# Altium PCB PCB_STM.PcbDoc (part 1 of 2)
Units mm, origin at the board's own origin, x right, y up, seen from the top; angles counter-clockwise.
Board outline 70.6 x 41.2 mm, 2 copper layers (Top Layer, Bottom Layer), stack 1.569 mm thick; 46 components, 35 nets, 243 pads, 370 vias.
Unrouted connection lines stored in the file: 46.
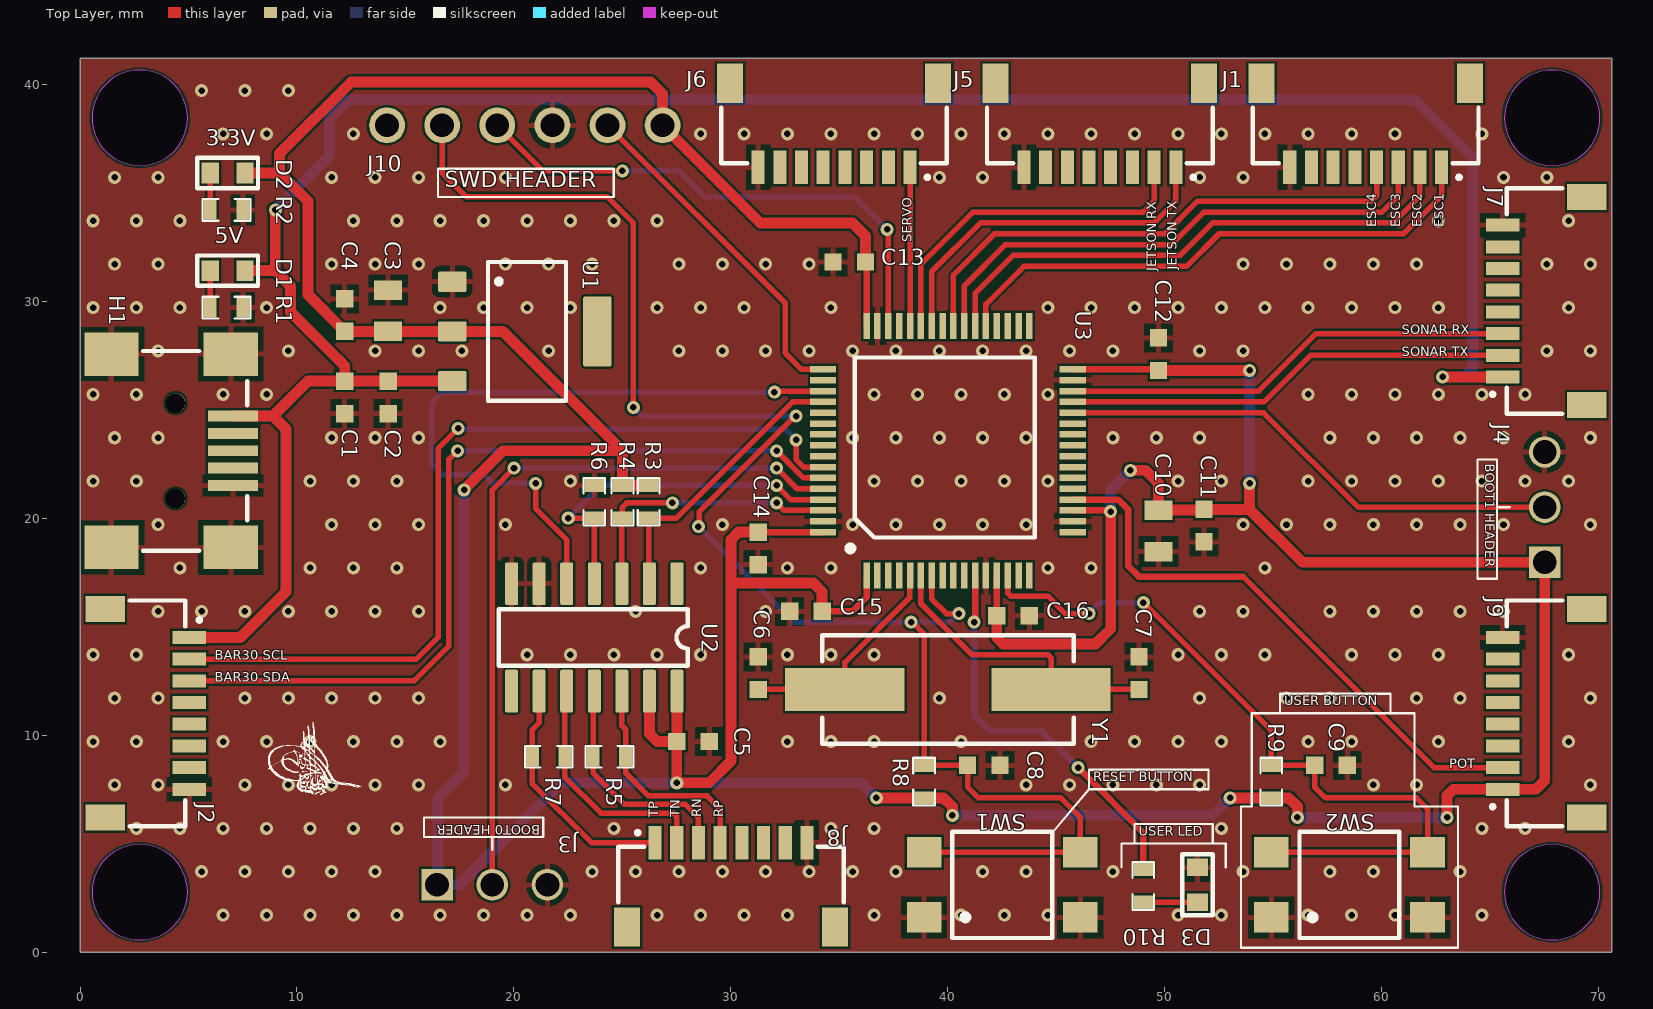
[diagram p0: Top Layer view]
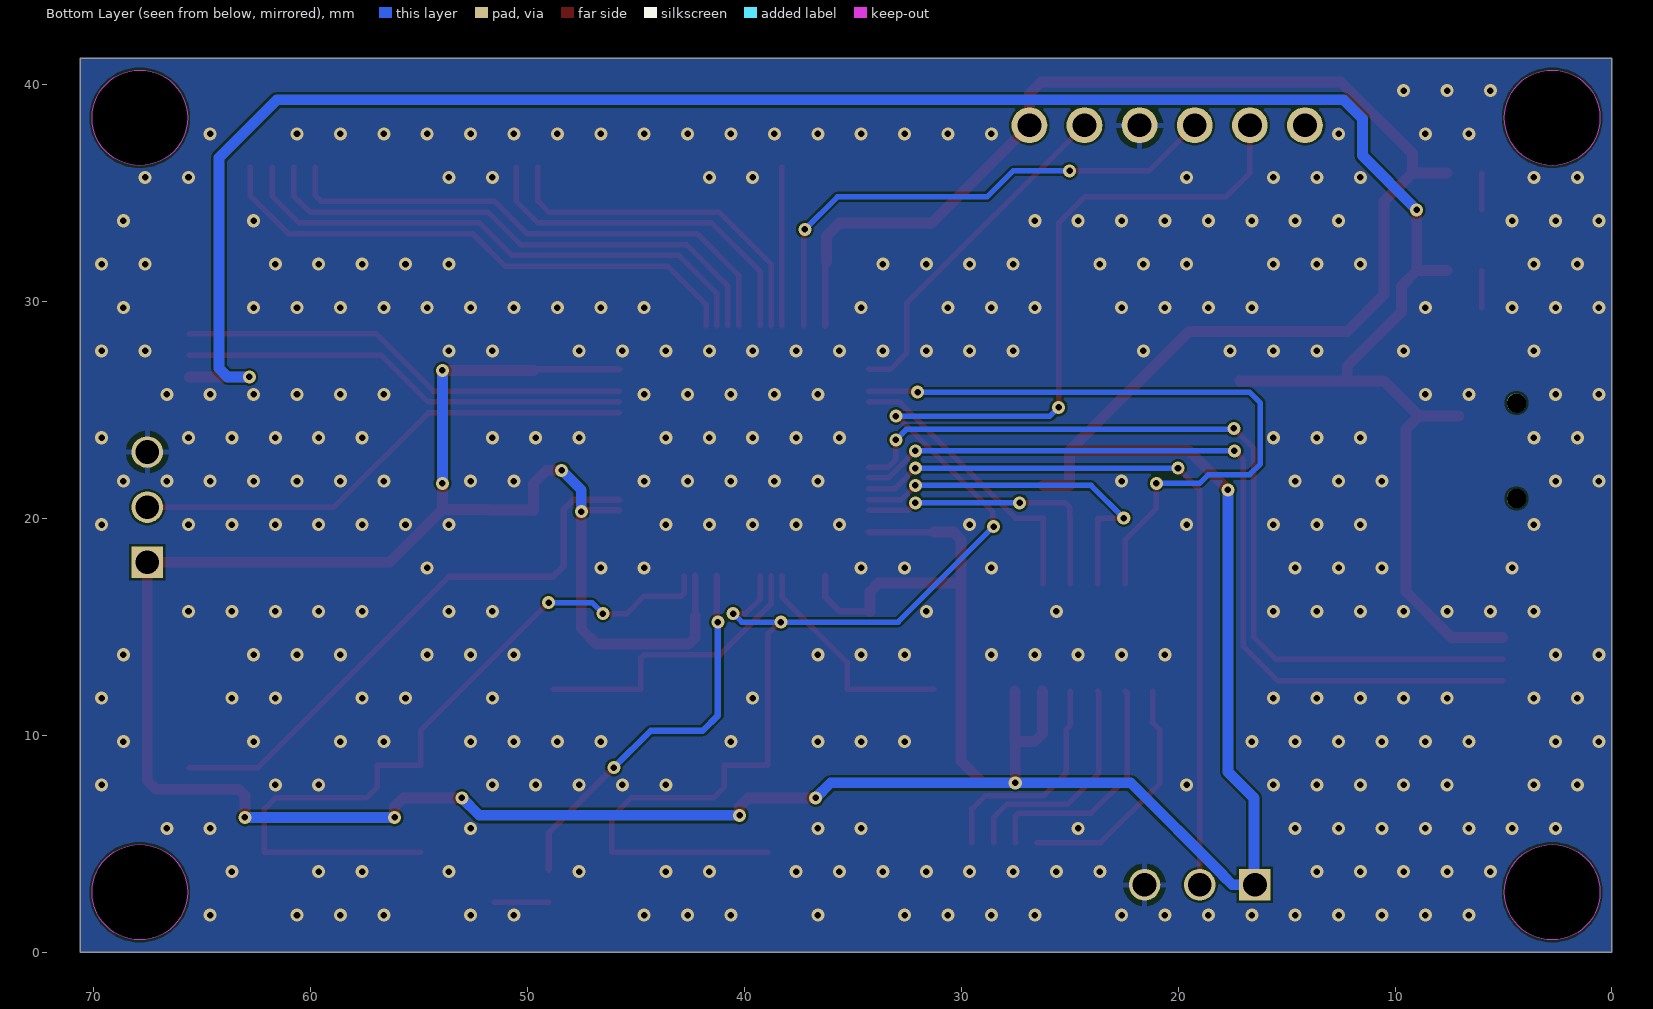
[diagram p1: Bottom Layer view, seen from below]
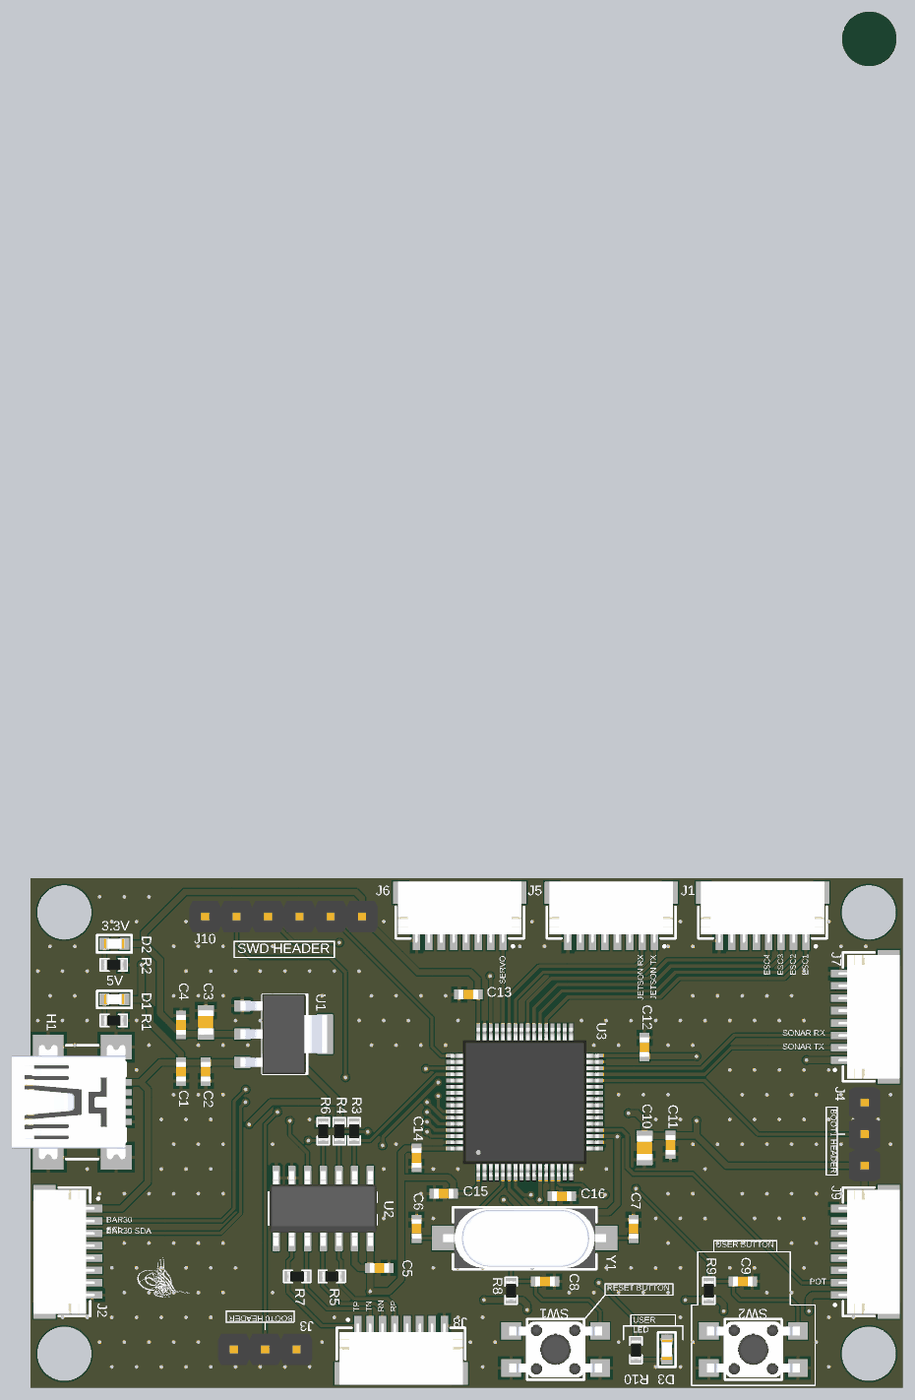
[diagram p2: 3D render of the assembled board from above, using the file's embedded part models]

## Layer stack, top to bottom
Top Solder: solder mask 0.0254, SM-001, Dk 4
Top Layer: signal copper 0.035
Dielectric 1: core 1.4986, Core-043, Dk 4.3
Bottom Layer: signal copper 0.035
Bottom Solder: solder mask 0.0254, SM-001, Dk 4

## Board outline
0,0 0,41.2 70.6,41.2 70.6,0
cut-out: 0.556,38.444 ccw(c2.756,38.444) 2.756,36.244 ccw(c2.756,38.444) 4.956,38.444 ccw(c2.756,38.444) 2.756,40.644 ccw(c2.756,38.444) 0.556,38.444
cut-out: 67.844,40.644 ccw(c67.844,38.444) 65.644,38.444 ccw(c67.844,38.444) 67.844,36.244 ccw(c67.844,38.444) 70.044,38.444 ccw(c67.844,38.444) 67.844,40.644
cut-out: 70.044,2.756 ccw(c67.844,2.756) 67.844,4.956 ccw(c67.844,2.756) 65.644,2.756 ccw(c67.844,2.756) 67.844,0.556 ccw(c67.844,2.756) 70.044,2.756
cut-out: 2.756,0.556 ccw(c2.756,2.756) 4.956,2.756 ccw(c2.756,2.756) 2.756,4.956 ccw(c2.756,2.756) 0.556,2.756 ccw(c2.756,2.756) 2.756,0.556
cut-out: 67.878,111.271 ccw(c67.878,109.071) 65.678,109.071 ccw(c67.878,109.071) 67.878,106.871 ccw(c67.878,109.071) 70.078,109.071 ccw(c67.878,109.071) 67.878,111.271

## Design rules (kind name [scope] priority, off if disabled: settings)
Clearance [All] p1: gap=0.153 ignorepadtopadclearanceinfootprint=TRUE
HoleToHoleClearance [All] p1: gap=0.1 allowstackedmicrovias=TRUE
MinimumSolderMaskSliver [All] p1: minsoldermaskwidth=0
PlaneClearance [All] p1: clearance=0.1
PolygonConnect [All] p1: connectstyle=Relief reliefconductorwidth=0.254 reliefentries=4 polygonreliefangle="90 Angle" airgapwidth=0.254
RoutingCorners [All] p1: cornerstyle=45-Degree minsetback=0.1 maxsetback=0.1
RoutingVias [All] p1: holewidth=0.2 width=0.4 viastyle="Through Hole" minholewidth=0.1 minwidth=0.3 maxholewidth=0.3 maxwidth=0.6
SilkToSilkClearance [All] p1: silktosilkclearance=0
SilkToSolderMaskClearance [IsPad] p1: minsilkscreentomaskgap=0 clearancetoexposedcopper=TRUE
SolderMaskExpansion [All] p1: expansion=0.01 istentingtop=FALSE
Width [All] p1: maxlimit=0.5 minlimit=0.254 preferedwidth=0.254 minimp=50.000000 maximp=50.000000 favimp=50.000000
24 further rules are at their usual default settings.

## Classes and differential pairs
component class PowerManagement: C1 C2 C3 C4 C5 D1 D2 H1 R1 R2 R3 R4 R5 R6 R7 U1 U2
component class Microcontroller: C6 C7 C8 C9 C10 C11 C12 C13 C14 C15 C16 D3 R8 R9 R10 SW1 SW2 U3 Y1
component class Connectors: J1 J2 J3 J4 J5 J6 J7 J8 J9 J10

## Components (designator, comment, footprint, x,y, rotation, side; value= is the part's Value field where it differs from the comment)
C1 "1uF" WCAP-CSGP_0603_L1.6W0.8H0.8_Reflow 12.2,25.56 r90 top
C2 "10uF" WCAP-CSGP_0603_L1.6W0.8H0.8_Reflow 14.2,25.56 r90 top
C3 "22uF" WCAP-CSGP_0805_L2W1.25H1.25 14.2,29.55 r270 top
C4 "1uF" WCAP-CSGP_0603_L1.6W0.8H0.8_Reflow 12.2,29.35 r270 top
C5 "100nF" WCAP-CSGP_0603_L1.6W0.8H0.8_Reflow 28.25,9.7 r180 top
C6 "15pF" WCAP-CSGP_0603_L1.6W0.8H0.8_Reflow 31.25,12.85 r270 top
C7 "15pF" WCAP-CSGP_0603_L1.6W0.8H0.8_Reflow 48.8,12.85 r270 top
C8 "100nF" WCAP-CSGP_0603_L1.6W0.8H0.8_Reflow 41.65,8.6 r0 top
C9 "100nF" WCAP-CSGP_0603_L1.6W0.8H0.8_Reflow 57.65,8.6 r0 top
C10 "4.7uF" WCAP-CSGP_0805_L2W1.25H1.25 49.7,19.4 r90 top
C11 "100nF" WCAP-CSGP_0603_L1.6W0.8H0.8_Reflow 51.8,19.65 r90 top
C12 "100nF" WCAP-CSGP_0603_L1.6W0.8H0.8_Reflow 49.7,27.55 r270 top
C13 "100nF" WCAP-CSGP_0603_L1.6W0.8H0.8_Reflow 35.45,31.8 r0 top
C14 "100nF" WCAP-CSGP_0603_L1.6W0.8H0.8_Reflow 31.25,18.6 r90 top
C15 "100nF" WCAP-CSGP_0603_L1.6W0.8H0.8_Reflow 33.45,15.7 r0 top
C16 "100nF" WCAP-CSGP_0603_L1.6W0.8H0.8_Reflow 43,15.5 r180 top
D1 "APT1608SGC" "LED GREEN" 6.802,31.4 r0 top
D2 "APT1608SGC" "LED GREEN" 6.802,35.9 r0 top
D3 "APT1608SGC" "LED GREEN" 51.5,3.1 r270 top
H1 "690-005-299-043" USB 4.25,23.1 r270 top
J1 "SM08B-SRSS-TB(LF)(SN)" "8 PIN HEADER" 59.25,38.1 r180 top
J2 "SM08B-SRSS-TB(LF)(SN)" "8 PIN HEADER" 3.1,11 r270 top
J3 "61300311121" "BOOT HEADER" 19,3.1 r0 top
J4 "61300311121" "BOOT HEADER" 67.5,20.5 r90 top
J5 "SM08B-SRSS-TB(LF)(SN)" "8 PIN HEADER" 47,38.1 r180 top
J6 "SM08B-SRSS-TB(LF)(SN)" "8 PIN HEADER" 34.75,38.1 r180 top
J7 "SM08B-SRSS-TB(LF)(SN)" "8 PIN HEADER" 67.5,30 r90 top
J8 "SM08B-SRSS-TB(LF)(SN)" "8 PIN HEADER" 30,3.1 r0 top
J9 "SM08B-SRSS-TB(LF)(SN)" "8 PIN HEADER" 67.5,11 r90 top
J10 "61300611121" "SWD HEADER" 20.5,38.1 r180 top
R1 "RC0603FR-07150RL" "RES 0603" 6.752,29.7 r180 top
R2 "RC0603FR-13100RL" "RES 0603" 6.752,34.2 r180 top
R3 "RC0603FR-0710KP" "RES 0603" 26.2,20.75 r90 top
R4 "RC0603FR-0710KP" "RES 0603" 25,20.75 r90 top
R5 "RC0603FR-07120RL" "RES 0603" 24.4,9 r180 top
R6 "RC0603FR-0710KP" "RES 0603" 23.7,20.75 r90 top
R7 "RC0603FR-07120RL" "RES 0603" 21.6,9 r0 top
R8 "RC0603FR-0710KP" "RES 0603" 38.9,7.85 r90 top
R9 "RC0603FR-0710KP" "RES 0603" 54.9,7.85 r90 top
R10 "RC0603FR-07330RL" "RES 0603" 49,3.05 r90 top
SW1 "TL3305AF260QG" "RESET BUTTON" 42.5,3.1 r90 top
SW2 "TL3305AF260QG" "RESET BUTTON" 58.5,3.1 r90 top
U1 "AMS1117-3.3" SOT-223 20.5,28.6 r0 top
U2 "SN65HVD1473DR" 14-SOIC 23.7,14.5 r270 top
U3 "STM32F107RCT6" STM32F107RCT6 40,23.1 r90 top
Y1 "ECS-80-20-5PXDU-TR" OSC 40,12.1 r0 top

## Footprints (in the part's own frame and the unit in brackets; to place one, negate y for a bottom-side part, rotate by r counter-clockwise, add the part's x,y. Pads: shape width x height; smd on the part's side, far side on the other; paste and mask are expansions set on the pad)
"8 PIN HEADER" [mm]
  rect 0.6x1.55 smd: 1(-3.5,1.938) 2(-2.5,1.938) 3(-1.5,1.938) 4(-0.5,1.938) 5(0.5,1.938) 6(1.5,1.938) 7(2.5,1.938) 8(3.5,1.938)
  rect 1.2x1.8 smd: P1(-4.8,-1.937) P2(4.8,-1.937)
  silkscreen extent -5.2,-0.8 5.2,2.47, body extent -5,-2.84 5,2.11, height 2.95
14-SOIC [mm]
  rrect25% 1.97x0.6 smd: 1(-2.475,3.81) 2(-2.475,2.54) 3(-2.475,1.27) 4(-2.475,0) 5(-2.475,-1.27) 6(-2.475,-2.54) 7(-2.475,-3.81) 8(2.475,-3.81) 9(2.475,-2.54) 10(2.475,-1.27) 11(2.475,0) 12(2.475,1.27) 13(2.475,2.54) 14(2.475,3.81)
  silkscreen extent -1.3,-4.4 1.3,4.3, body extent -3.01,-4.33 3.01,4.33, height 1.75
"BOOT HEADER" [mm]
  rect 1.45x1.45 / inner round 1.45 / far side rect 1.45x1.45 hole 1.1: 1(-2.54,0)
  round 1.45 hole 1.1: 2(0,0) 3(2.54,0)
  body extent -3.81,-1.27 3.81,1.27, height 8.77
"LED GREEN" [mm]
  rect 0.8x0.95 smd: 1(-0.8,0) 2(0.8,0)
  silkscreen extent -1.4,-0.7 1.4,0.7, body extent -0.81,-0.4 0.8,0.4, height 0.72
OSC [mm]
  rect 5.5x2 smd: 1(-4.75,0) 2(4.75,0)
  silkscreen extent -5.8,-2.5 5.8,2.5, body extent -6.6,-2.41 6.6,2.39, height 4.3
"RES 0603" [mm]
  rect 0.6x0.9 smd mask+0.05: 1(-0.75,0) 2(0.75,0)
  silkscreen extent -1.1,-0.5 1.1,0.5, body extent -0.8,-0.4 0.8,0.4, height 0.45
"RESET BUTTON" [mm]
  rect 1.4x1.6 smd: 1(-1.5,3.6) 2(-1.5,-3.6) 3(1.5,3.6) 4(1.5,-3.6)
  silkscreen extent -2.45,-2.3 2.45,2.3, body extent -2.25,-3.75 2.25,3.75, height 3.8
SOT-223 [mm]
  rrect15% 1.31x0.93 smd: 1(-3.345,2.29) 2(-3.345,0) 3(-3.345,-2.29)
  rrect15% 1.31x3.24 smd: 4(3.345,0)
  silkscreen extent -1.7,-3.2 1.9,3.2, body extent -3.5,-3.25 3.5,3.25, height 1.8
STM32F107RCT6 [mm]
  rect 1.2x0.3 smd mask+0.05: 1(-5.75,3.75) 2(-5.75,3.25) 3(-5.75,2.75) 4(-5.75,2.25) 5(-5.75,1.75) 6(-5.75,1.25) 7(-5.75,0.75) 8(-5.75,0.25) 9(-5.75,-0.25) 10(-5.75,-0.75) 11(-5.75,-1.25) 12(-5.75,-1.75) 13(-5.75,-2.25) 14(-5.75,-2.75) 15(-5.75,-3.25) 16(-5.75,-3.75) 33(5.75,-3.75) 34(5.75,-3.25) 35(5.75,-2.75) 36(5.75,-2.25) 37(5.75,-1.75) 38(5.75,-1.25) 39(5.75,-0.75) 40(5.75,-0.25) 41(5.75,0.25) 42(5.75,0.75) 43(5.75,1.25) 44(5.75,1.75) 45(5.75,2.25) 46(5.75,2.75) 47(5.75,3.25) 48(5.75,3.75)
  rect 0.3x1.2 smd mask+0.05: 17(-3.75,-5.75) 18(-3.25,-5.75) 19(-2.75,-5.75) 20(-2.25,-5.75) 21(-1.75,-5.75) 22(-1.25,-5.75) 23(-0.75,-5.75) 24(-0.25,-5.75) 25(0.25,-5.75) 26(0.75,-5.75) 27(1.25,-5.75) 28(1.75,-5.75) 29(2.25,-5.75) 30(2.75,-5.75) 31(3.25,-5.75) 32(3.75,-5.75) 49(3.75,5.75) 50(3.25,5.75) 51(2.75,5.75) 52(2.25,5.75) 53(1.75,5.75) 54(1.25,5.75) 55(0.75,5.75) 56(0.25,5.75) 57(-0.25,5.75) 58(-0.75,5.75) 59(-1.25,5.75) 60(-1.75,5.75) 61(-2.25,5.75) 62(-2.75,5.75) 63(-3.25,5.75) 64(-3.75,5.75)
  silkscreen extent -4.62,-4 4.3,4.62, body extent -6,-6 6,6, height 1.6
"SWD HEADER" [mm]
  round 1.65 hole 1.1: 1(-6.35,0) 2(-3.81,0) 3(-1.27,0) 4(1.27,0) 5(3.81,0) 6(6.35,0)
  body extent -7.62,-1.27 7.62,1.27, height 8.77
USB [mm]
  rect 0.5x2.3 smd: 1(-1.6,2.8) 2(-0.8,2.8) 3(0,2.8) 4(0.8,2.8) 5(1.6,2.8)
  rect 2x2.5 smd: S1(-4.45,2.7) S2(4.45,2.7) S3(4.45,-2.8) S4(-4.45,-2.8)
  round 0.9 hole 0.9 unplated: ""(-2.2,0.15) ""(2.2,0.15)
  silkscreen extent -4.6,-1.35 4.6,3.45, body extent -4.62,-5.75 4.62,3.45, height 3.98
WCAP-CSGP_0603_L1.6W0.8H0.8_Reflow [mm] "Ceramic Capacitors, body 1.6x0.8mm"
  rect 0.8x0.8 smd: 1(-0.75,0) 2(0.75,0)
  body extent -0.8,-0.4 0.8,0.4, height 0.8
WCAP-CSGP_0805_L2W1.25H1.25 [mm] "Ceramic Capacitors, body 2x1.25mm"
  rect 0.9x1.3 smd: 1(-0.95,0) 2(0.95,0)
  body extent -1,-0.63 1,0.63, height 1.25

## Part data
C1 C4: library part 885012106010, "WCAP-CSGP Multilayer Ceramic Chip Capacitor, General Purpose, size 0603, X5R, 1µF, 10VDC", Capacitance Tolerance=+/-20%, Case/Size Code=0603, Manufacturer="Wurth Elektronik", Operating Temperature Max=85°C, Operating Temperature Min=-55°C, Rated Voltage (DC)=10V, Insulation Resistance=0.1GOhm, Capacitance=1uF, Category="Multilayer Ceramic Chip Capacitors", Ceramic Type=X5R, ComponentLink1Description="Website Link", ComponentLink1URL=https://www.we-online.com/redexpert/article/885012106010?ad, ComponentLink2Description="Datasheet Link", ComponentLink2URL=https://www.we-online.com/redexpert/spec/885012106010?ad, Dissipation Factor=10%, Height=0.8mm, Length=1.6mm, Manufacturer Part Number=885012106010, Match Code=WCAP-CSGP, Mount="Surface Mount", Packaging="Tape and Reel", Technical Reference=X5R0603105M010DFCT10000, Width=0.8mm
C2: library part 885012106031, "WCAP-CSGP Multilayer Ceramic Chip Capacitor, General Purpose, size 0603, X5R, 10µF, 25VDC", Capacitance Tolerance=+/20%, Case/Size Code=0603, Manufacturer="Wurth Elektronik", Operating Temperature Max=85°C, Operating Temperature Min=-55°C, Rated Voltage (DC)=25V, Insulation Resistance=0.01GOhm, Capacitance=10uF, Category="Multilayer Ceramic Chip Capacitors", Ceramic Type=X5R, ComponentLink1Description="Website Link", ComponentLink1URL=https://www.we-online.com/redexpert/article/885012106031?ad, ComponentLink2Description="Datasheet Link", ComponentLink2URL=https://www.we-online.com/redexpert/spec/885012106031?ad, Dissipation Factor=20%, Height=0.8mm, Length=1.6mm, Manufacturer Part Number=885012106031, Match Code=WCAP-CSGP, Mount="Surface Mount", Packaging="Tape and Reel", Technical Reference=X5R0603106M025DFCT10000, Width=0.8mm
C3: library part 885012107011, "WCAP-CSGP Multilayer Ceramic Chip Capacitor, General Purpose, size 0805, X5R, 22µF, 10VDC", Capacitance Tolerance=+/-20%, Case/Size Code=0805, Manufacturer="Wurth Elektronik", Operating Temperature Max=85°C, Operating Temperature Min=-55°C, Rated Voltage (DC)=10V, Insulation Resistance=0.005GOhm, Capacitance=22uF, Category="Multilayer Ceramic Chip Capacitors", Ceramic Type=X5R, ComponentLink1Description="Website Link", ComponentLink1URL=https://www.we-online.com/redexpert/article/885012107011?ad, ComponentLink2Description="Datasheet Link", ComponentLink2URL=https://www.we-online.com/redexpert/spec/885012107011?ad, Dissipation Factor=10%, Height=1.25mm, Length=2mm, Manufacturer Part Number=885012107011, Match Code=WCAP-CSGP, Mount="Surface Mount", Packaging="Tape and Reel", Technical Reference=X5R0805226M010DFCT10000, Width=1.25mm
C5 C11 C12 C13 C14 C15 C16: library part 885012206046, "WCAP-CSGP Multilayer Ceramic Chip Capacitor, General Purpose, size 0603, X7R, 100nF, 16VDC", Capacitance Tolerance=+/-10%, Case/Size Code=0603, Manufacturer="Wurth Elektronik", Operating Temperature Max=125°C, Operating Temperature Min=-55°C, Rated Voltage (DC)=16V, Insulation Resistance=5GOhm, Capacitance=100nF, Category="Multilayer Ceramic Chip Capacitors", Ceramic Type=X7R, ComponentLink1Description="Website Link", ComponentLink1URL=https://www.we-online.com/redexpert/article/885012206046?ad, ComponentLink2Description="Datasheet Link", ComponentLink2URL=https://www.we-online.com/redexpert/spec/885012206046?ad, Dissipation Factor=3.5%, Height=0.8mm, Length=1.6mm, Manufacturer Part Number=885012206046, Match Code=WCAP-CSGP, Mount="Surface Mount", Packaging="Tape and Reel", Technical Reference=X7R0603104K016DFCT10000, Width=0.8mm
C6 C7: library part 885012006018, "WCAP-CSGP Multilayer Ceramic Chip Capacitor, General Purpose, size 0603, NP0, 15pF, 16VDC", Capacitance Tolerance=+/-5%, Case/Size Code=0603, Manufacturer="Wurth Elektronik", Operating Temperature Max=125°C, Operating Temperature Min=-55°C, Rated Voltage (DC)=16V, Insulation Resistance=10GOhm, Capacitance=15pF, Category="Multilayer Ceramic Chip Capacitors", Ceramic Type=NP0, ComponentLink1Description="Website Link", ComponentLink1URL=https://www.we-online.com/redexpert/article/885012006018?ad, ComponentLink2Description="Datasheet Link", ComponentLink2URL=https://www.we-online.com/redexpert/spec/885012006018?ad, Height=0.8mm, Length=1.6mm, Manufacturer Part Number=885012006018, Match Code=WCAP-CSGP, Mount="Surface Mount", Packaging="Tape and Reel", Q Factor=700, Technical Reference=NP00603150J016DFCT10000, Width=0.8mm
C8 C9: library part 885012206020, "WCAP-CSGP Multilayer Ceramic Chip Capacitor, General Purpose, size 0603, X7R, 100nF, 10VDC", Capacitance Tolerance=+/-10%, Case/Size Code=0603, Manufacturer="Wurth Elektronik", Operating Temperature Max=125°C, Operating Temperature Min=-55°C, Rated Voltage (DC)=10V, Insulation Resistance=5GOhm, Capacitance=100nF, Category="Multilayer Ceramic Chip Capacitors", Ceramic Type=X7R, ComponentLink1Description="Website Link", ComponentLink1URL=https://www.we-online.com/redexpert/article/885012206020?ad, ComponentLink2Description="Datasheet Link", ComponentLink2URL=https://www.we-online.com/redexpert/spec/885012206020?ad, Dissipation Factor=5%, Height=0.8mm, Length=1.6mm, Manufacturer Part Number=885012206020, Match Code=WCAP-CSGP, Mount="Surface Mount", Packaging="Tape and Reel", Technical Reference=X7R0603104K010DFCT10000, Width=0.8mm
C10: library part 885012207053, "WCAP-CSGP Multilayer Ceramic Chip Capacitor, General Purpose, size 0805, X7R, 4.7µF, 16VDC", Capacitance Tolerance=+/-10%, Case/Size Code=0805, Manufacturer="Wurth Elektronik", Operating Temperature Max=125°C, Operating Temperature Min=-55°C, Rated Voltage (DC)=16V, Insulation Resistance=0.02GOhm, Capacitance=4.7uF, Category="Multilayer Ceramic Chip Capacitors", Ceramic Type=X7R, ComponentLink1Description="Website Link", ComponentLink1URL=https://www.we-online.com/redexpert/article/885012207053?ad, ComponentLink2Description="Datasheet Link", ComponentLink2URL=https://www.we-online.com/redexpert/spec/885012207053?ad, Dissipation Factor=10%, Height=1.25mm, Length=2mm, Manufacturer Part Number=885012207053, Match Code=WCAP-CSGP, Mount="Surface Mount", Packaging="Tape and Reel", Technical Reference=X7R0805475K016DFCT10000, Width=1.25mm
D1 D2 D3: "LED GREEN CLEAR 0603 SMD", Case Code (Metric)=1608, Case Code (Imperial)=0603, Color=Green, Forward Current=20mA, Forward Voltage=2.2V, Lens Color=Clear, Manufacturer=Kingbright, Max Operating Temperature=85°C, Min Operating Temperature=-40°C, Package Quantity=2000, Supplier Part Number 1=754-1121-1-ND, Case/Package=0603, Category=LEDs, ComponentLink1Description=https://datasheet.ciiva.com/12400/apt1608sgc-32861-12400932.pdf?src-supplier=Mouser, ComponentLink1URL=https://datasheet.ciiva.com/12400/apt1608sgc-32861-12400932.pdf?src-supplier=Mouser, ComponentLink2Description=https://datasheet.ciiva.com/2113/apt1608sgc-2113808.pdf?src-supplier=Digi-Key, ComponentLink2URL=https://datasheet.ciiva.com/2113/apt1608sgc-2113808.pdf?src-supplier=Digi-Key, ComponentLink3Description=https://datasheet.ciiva.com/14603/70062839-14603927.pdf?src-supplier=Allied+Electronics, ComponentLink3URL=https://datasheet.ciiva.com/14603/70062839-14603927.pdf?src-supplier=Allied+Electronics, Designed by=ADAK, Dominant Wavelength=568nm, Height=0.75mm, Lead Free="Lead Free", Length=1.6mm, Lens Style=Clear,Flat, Luminous Intensity=15mcd, Manufacturer Part Number=APT1608SGC, Mount="Surface Mount", Number of LEDs=1, Number of Pins=2, Packaging="Tape and Reel", Pricing 1="1=0,3, 10=0,237, 100=0,1064, 500=0,0961, 1000=0,07894 (USD)", RoHS=Yes, RoHS Compliant=Yes, Series=APT, Stock 1=356278, Supplier 1=Digi-Key, Test Current=20mA, Viewing Angle=120°, Wavelength=568nm, Width=0.8mm, Illumination Color=Green
H1: library part "USB Mini B", "CONN RCPT USB2.0 MINI B SMD R/A", Color=Black, Flammability Rating="UL94 V-0", Manufacturer=EDAC, Max Operating Temperature=80°C, Min Operating Temperature=-30°C, Supplier Part Number 1=151-1206-1-ND, Category="USB Connectors", ComponentLink1Description=https://datasheet.ciiva.com/30246/690-005-299-043-30246515.pdf?src-supplier=Onlinecomponents.com, ComponentLink1URL=https://datasheet.ciiva.com/30246/690-005-299-043-30246515.pdf?src-supplier=Onlinecomponents.com, ComponentLink2Description=https://datasheet.ciiva.com/29660/690-005-299-043-29660027.pdf?src-supplier=Digi-Key, ComponentLink2URL=https://datasheet.ciiva.com/29660/690-005-299-043-29660027.pdf?src-supplier=Digi-Key, ComponentLink3Description=https://datasheet.ciiva.com/29660/690-005-299-043-29660028.pdf?src-supplier=Digi-Key, ComponentLink3URL=https://datasheet.ciiva.com/29660/690-005-299-043-29660028.pdf?src-supplier=Digi-Key, ComponentLink4Description=https://datasheet.ciiva.com/29660/690-005-299-043-29660029.pdf?src-supplier=Digi-Key, ComponentLink4URL=https://datasheet.ciiva.com/29660/690-005-299-043-29660029.pdf?src-supplier=Digi-Key, Connector Type=USB, Contact Material=Bronze, Contact Plating=Gold, Designed by=ADAK, Gender=Receptacle, Housing Material=Thermoplastic, Lead Free="Lead Free", Manufacturer Part Number=690-005-299-043, Mating Cycles=1500, Mount="Surface Mount,Horizontal", Number of Contacts=5, Number of Ports=1, Orientation="Right Angle", Packaging="Cut Tape", Pitch=0.8mm, Pricing 1="1=0,65, 10=0,564, 25=0,5152, 50=0,4848, 100=0,4646, 250=0,4242, 500=0,404 (USD)", RoHS=No, Series=690, Shielding=Unshielded, Stock 1=72958, Supplier 1=Digi-Key, Termination=Solder, Insulation Color=Black
J1 J2 J5 J6 J7 J8 J9: "Connector Header, Side Entry, SR Series, 8 Position, 1.00mm, 50V, Surface Mount, Tin, Natural", Manufacturer=JST, Supplier Part Number 1=1679124, Category=Connectors, ComponentLink1Description=https://datasheet.ciiva.com/11752/0900766b8082f54b-11752174.pdf?src-supplier=Rs, ComponentLink1URL=https://datasheet.ciiva.com/11752/0900766b8082f54b-11752174.pdf?src-supplier=Rs, ComponentLink2Description=https://datasheet.ciiva.com/8052/91630-8052285.pdf?src-supplier=Element14, ComponentLink2URL=https://datasheet.ciiva.com/8052/91630-8052285.pdf?src-supplier=Element14, ComponentLink3Description=https://datasheet.ciiva.com/729/esr-729838.pdf?src-supplier=Digi-Key, ComponentLink3URL=https://datasheet.ciiva.com/729/esr-729838.pdf?src-supplier=Digi-Key, ComponentLink4Description=https://datasheet.ciiva.com/712/esr-712599.pdf?src-supplier=Digi-Key, ComponentLink4URL=https://datasheet.ciiva.com/712/esr-712599.pdf?src-supplier=Digi-Key, ComponentLink5Description=https://datasheet.ciiva.com/712/esr-712600.pdf?src-supplier=Digi-Key, ComponentLink5URL=https://datasheet.ciiva.com/712/esr-712600.pdf?src-supplier=Digi-Key, ComponentLink6Description=https://datasheet.ciiva.com/16487/esr-16487087.pdf?src-supplier=Future+Electronics, ComponentLink6URL=https://datasheet.ciiva.com/16487/esr-16487087.pdf?src-supplier=Future+Electronics, Designed by=ADAK, Manufacturer Part Number=SM08B-SRSS-TB(LF)(SN), Pricing 1="10=0,776, 100=0,639, 500=0,522, 1000=0,464, 2500=0,443, 5000=0,421 (EUR)", RoHS=Yes, Stock 1=77890, Supplier 1=Farnell
J3 J4: "CONN HEADER VERT 3POS 2.54MM", Color=Black, Manufacturer="Wurth Electronics", Supplier Part Number 1=732-5316-ND, Category=Connectors, ComponentLink1Description=http://www.farnell.com/cad/1737268.pdf?src-supplier=Element14, ComponentLink1URL=http://www.farnell.com/cad/1737268.pdf?src-supplier=Element14, ComponentLink2Description=https://datasheet.octopart.com/61300311121-W%C3%BCrth-Elektronik-datasheet-21154836.pdf?src-supplier=Element14, ComponentLink2URL=https://datasheet.octopart.com/61300311121-W%C3%BCrth-Elektronik-datasheet-21154836.pdf?src-supplier=Element14, ComponentLink3Description=https://katalog.we-online.de/em/datasheet/6130xx11121.pdf?src-supplier=Digi-Key, ComponentLink3URL=https://katalog.we-online.de/em/datasheet/6130xx11121.pdf?src-supplier=Digi-Key, Contact Material=Copper, Contact Mating Length=0.236inch, Contact Plating=Gold, Contact Type="Male Pin", Designed by=ADAK, Gender=Male, Lead Free="Lead Free", Manufacturer Part Number=61300311121, Mount="Through Hole", Number of Contacts=3, Number of Positions=3, Number of Rows=1, Packaging=Bulk, Pitch=0.1inch, Pricing 1="1=0,13, 10=0,113, 25=0,094, 50=0,079, 100=0,071, 1000=0,066 (USD)", Reach SVHC Compliant=Unknown, RoHS=Yes, RoHS Compliant=Yes, Series=WR-PHD, Stock 1=116212, Supplier 1=Digi-Key, Termination=Solder
J10: "CONN HEADER VERT 6POS 2.54MM", Color=Black, Current Rating=3A, Manufacturer="Wurth Electronics", Max Operating Temperature=125°C, Min Operating Temperature=-40°C, Supplier Part Number 1=732-5319-ND, Voltage Rating=250V, Category="Headers and Wire Housings", ComponentLink1Description=http://www.mouser.com/ds/2/445/6130xx11121-538006.pdf?src-supplier=Mouser, ComponentLink1URL=http://www.mouser.com/ds/2/445/6130xx11121-538006.pdf?src-supplier=Mouser, ComponentLink2Description=http://www.farnell.com/cad/1737268.pdf?src-supplier=Element14, ComponentLink2URL=http://www.farnell.com/cad/1737268.pdf?src-supplier=Element14, ComponentLink3Description=https://datasheet.octopart.com/61300611121-W%C3%BCrth-Elektronik-datasheet-21154836.pdf?src-supplier=Element14, ComponentLink3URL=https://datasheet.octopart.com/61300611121-W%C3%BCrth-Elektronik-datasheet-21154836.pdf?src-supplier=Element14, ComponentLink4Description=https://katalog.we-online.de/em/datasheet/6130xx11121.pdf?src-supplier=Digi-Key, ComponentLink4URL=https://katalog.we-online.de/em/datasheet/6130xx11121.pdf?src-supplier=Digi-Key, Contact Gender=Male, Contact Material="Copper Alloy,Copper", Contact Mating Length=0.236inch, Contact Plating=Gold, Contact Type="Male Pin", Designed by=ADAK, Gender=Male, Housing Material=PBT, Lead Free="Lead Free", Manufacturer Part Number=61300611121, Mount="Through Hole", Number of Contacts=6, Number of Positions=6, Number of Rows=1, Packaging=Bulk, Pitch=0.1inch, Pricing 1="1=0,35, 10=0,298, 25=0,2472, 50=0,207, 100=0,187, 1000=0,171 (USD)", Reach SVHC Compliant=Unknown, RoHS=Yes, RoHS Compliant=Yes, Series=WR-PHD, Stock 1=10537, Supplier 1=Digi-Key, Termination="Through Hole"
R1: library part "RES 150 OHM 0603", "RES 150 OHM 1% 1/10W 0603 SMD", Case Code (Metric)=1608, Case Code (Imperial)=0603, Manufacturer=Yageo, Max Operating Temperature=155°C, Max Power Dissipation=100mW, Min Operating Temperature=-55°C, Package Quantity=5000, Resistance=150R, Resistance Tolerance=1%, Resistor Type="Thick Film", Supplier Part Number 1=311-150HRCT-ND, Temperature Coefficient=100ppm/°C, Voltage Rating=50V, Case/Package=0603, Category="Chip SMD Resistors", ComponentLink1Description=https://datasheet.ciiva.com/46412/443971-46412844.pdf?src-supplier=Element14, ComponentLink1URL=https://datasheet.ciiva.com/46412/443971-46412844.pdf?src-supplier=Element14, ComponentLink2Description=https://datasheet.ciiva.com/46440/1868787-46440893.pdf?src-supplier=Element14, ComponentLink2URL=https://datasheet.ciiva.com/46440/1868787-46440893.pdf?src-supplier=Element14, ComponentLink3Description=https://datasheet.ciiva.com/12555/rc0603-272842-12555301.pdf?src-supplier=Mouser, ComponentLink3URL=https://datasheet.ciiva.com/12555/rc0603-272842-12555301.pdf?src-supplier=Mouser, Designed by=ADAK, Features="Moisture Resistant", Height=0.45mm, Lead Free="Lead Free", Length=1.6mm, Manufacturer Part Number=RC0603FR-07150RL, Number of Pins=2, Number of Terminations=2, Packaging="Tape and Reel", Power Rating=100mW, Pricing 1="1=0,1, 10=0,018, 50=0,0106, 100=0,0088, 500=0,00592, 1000=0,00505 (USD)", Reach SVHC Compliant=No, RoHS=Yes, RoHS Compliant=Yes, Series=RC, Size Code=0603, Stock 1=1463209, Supplier 1=Digi-Key, Termination=SMD/SMT, Tolerance=1%, Voltage Rating (DC)=50V, Width=0.8mm
R2: library part "RES 100 OHM 0603", "RES 100 OHM 1% 1/10W 0603 SMD", Case Code (Metric)=1608, Case Code (Imperial)=0603, Manufacturer=Yageo, Max Operating Temperature=155°C, Min Operating Temperature=-55°C, Power Rating=100mW, Resistance=100R, Resistance Tolerance=1%, Resistor Type="Thick Film", Supplier Part Number 1=13-RC0603FR-13100RLCT-ND, Temperature Coefficient=100ppm/°C, Voltage Rating=50V, Case/Package=0603, Category="Chip SMD Resistors", ComponentLink1Description=https://datasheet.ciiva.com/7983/443971-7983671.pdf?src-supplier=Element14, ComponentLink1URL=https://datasheet.ciiva.com/7983/443971-7983671.pdf?src-supplier=Element14, ComponentLink2Description=https://datasheet.ciiva.com/12561/rc0603-272842-12561884.pdf?src-supplier=Mouser, ComponentLink2URL=https://datasheet.ciiva.com/12561/rc0603-272842-12561884.pdf?src-supplier=Mouser, Designed by=ADAK, Height=0.45mm, Lead Free="Lead Free", Length=1.6mm, Manufacturer Part Number=RC0603FR-13100RL, Number of Pins=2, Packaging="Tape and Reel", Pricing 1="1=0,1, 10=0,018, 50=0,0106, 100=0,0088, 500=0,00592, 1000=0,00505, 5000=0,00363, 10000=0,00318 (USD)", Reach SVHC Compliant=No, RoHS=Yes, RoHS Compliant=Yes, Series=RC, Size Code=0603, Stock 1=77195, Supplier 1=Digi-Key, Termination=SMD/SMT, Tolerance=1%, Voltage Rating (DC)=50V, Width=0.8mm
R3 R4 R6 R8 R9: library part "RES 10K OHM 0603", "RES 10K OHM 1% 1/10W 0603 SMD", Case Code (Metric)=1608, Case Code (Imperial)=0603, Manufacturer=Yageo, Max Operating Temperature=155°C, Max Power Dissipation=100mW, Min Operating Temperature=-55°C, Resistance=10kR, Supplier Part Number 1=YAG1290CT-ND, Temperature Coefficient=150ppm/°C, Tolerance=1%, Case/Package=0603, Category="Chip SMD Resistors", ComponentLink1Description=https://www.mouser.com/ds/2/447/yageodocoutput-1115409.pdf?src-supplier=Mouser, ComponentLink1URL=https://www.mouser.com/ds/2/447/yageodocoutput-1115409.pdf?src-supplier=Mouser, ComponentLink2Description=http://www.yageo.com/NewPortal/yageodocoutput?fileName=/pdf/R-Chip/PYu-RC_51_RoHS_P_0.pdf&src-supplier=Digi-Key, ComponentLink2URL=http://www.yageo.com/NewPortal/yageodocoutput?fileName=/pdf/R-Chip/PYu-RC_51_RoHS_P_0.pdf&src-supplier=Digi-Key, ComponentLink3Description=http://www.yageo.com.tw/exep/pages/download/literatures/PYu-R_INT-thick_7.pdf?src-supplier=Digi-Key, ComponentLink3URL=http://www.yageo.com.tw/exep/pages/download/literatures/PYu-R_INT-thick_7.pdf?src-supplier=Digi-Key, Designed by=ADAK, Features="Moisture Resistant", Height=0.022inch, Length=0.063inch, Manufacturer Part Number=RC0603FR-0710KP, Number of Terminations=2, Packaging="Cut Tape", Pricing 1="1=0,1, 10=0,024, 50=0,0154, 100=0,0129, 500=0,00892, 1000=0,0077 (USD)", RoHS=Yes, RoHS Compliant=Yes, Series="RC-P Lead Free", Stock 1=239190, Supplier 1=Digi-Key, Width=0.031inch
R5 R7: library part "RES 120 OHM 0603", "RES 120 OHM 1% 1/10W 0603 SMD", Case Code (Metric)=1608, Case Code (Imperial)=0603, Manufacturer=Yageo, Max Operating Temperature=155°C, Max Power Dissipation=100mW, Min Operating Temperature=-55°C, Package Quantity=1, Resistance=120R, Resistance Tolerance=1%, Resistor Type="Thick Film", Supplier Part Number 1=311-120HRCT-ND, Temperature Coefficient=100ppm/°C, Voltage Rating=50V, Case/Package=0603, Category="Chip SMD Resistors", ComponentLink1Description=https://datasheet.ciiva.com/46395/443971-46395021.pdf?src-supplier=Element14, ComponentLink1URL=https://datasheet.ciiva.com/46395/443971-46395021.pdf?src-supplier=Element14, ComponentLink2Description=https://datasheet.ciiva.com/2553/pyu-r-int-thick-7-2553513.pdf?src-supplier=Digi-Key, ComponentLink2URL=https://datasheet.ciiva.com/2553/pyu-r-int-thick-7-2553513.pdf?src-supplier=Digi-Key, ComponentLink3Description=https://datasheet.ciiva.com/2553/pyu-r-int-thick-7-2553514.pdf?src-supplier=Digi-Key, ComponentLink3URL=https://datasheet.ciiva.com/2553/pyu-r-int-thick-7-2553514.pdf?src-supplier=Digi-Key, ComponentLink4Description=https://datasheet.ciiva.com/2553/pyu-r-int-thick-7-2553512.pdf?src-supplier=Digi-Key, ComponentLink4URL=https://datasheet.ciiva.com/2553/pyu-r-int-thick-7-2553512.pdf?src-supplier=Digi-Key, ComponentLink5Description=https://datasheet.ciiva.com/7746/443971-7746249.pdf?src-supplier=Element14, ComponentLink5URL=https://datasheet.ciiva.com/7746/443971-7746249.pdf?src-supplier=Element14, ComponentLink6Description=https://datasheet.ciiva.com/7746/443971-7746248.pdf?src-supplier=Element14, ComponentLink6URL=https://datasheet.ciiva.com/7746/443971-7746248.pdf?src-supplier=Element14, Construction=Rectangular, Depth=0.8mm, Designed by=ADAK, Features="Moisture Resistant", Height=0.022inch, Lead Free="Lead Free", Length=0.063inch, Manufacturer Part Number=RC0603FR-07120RL, Military Standard=Not, Number of Pins=2, Number of Terminations=2, Packaging="Tape and Reel", Power Rating=100mW, Pricing 1="1=0,1, 10=0,018, 50=0,0106, 100=0,0088, 500=0,00592, 1000=0,00505 (USD)", Reach SVHC Compliant=No, RoHS=Yes, RoHS Compliant=Yes, Series=RC, Size Code=0603, Stock 1=665150, Supplier 1=Digi-Key, Termination=SMD/SMT, Tolerance=1%, Voltage Rating (DC)=50V, Width=0.031inch
R10: library part "RES 330 OHM 0603", "RES 330 OHM 1% 1/10W 0603 SMD", Case Code (Metric)=1608, Case Code (Imperial)=0603, Manufacturer=Yageo, Max Operating Temperature=155°C, Max Power Dissipation=100mW, Min Operating Temperature=-55°C, Package Quantity=1, Resistance=330R, Resistance Tolerance=1%, Resistor Type="Thick Film", Supplier Part Number 1=311-330HRCT-ND, Temperature Coefficient=100ppm/°C, Voltage Rating=50V, Case/Package=0603, Category="Chip SMD Resistors", ComponentLink1Description=https://datasheet.ciiva.com/11819/0900766b80f96399-11819327.pdf?src-supplier=Rs, ComponentLink1URL=https://datasheet.ciiva.com/11819/0900766b80f96399-11819327.pdf?src-supplier=Rs, ComponentLink2Description=https://datasheet.ciiva.com/7746/1686128-7746331.pdf?src-supplier=Element14, ComponentLink2URL=https://datasheet.ciiva.com/7746/1686128-7746331.pdf?src-supplier=Element14, ComponentLink3Description=https://datasheet.ciiva.com/46440/1868787-46440904.pdf?src-supplier=Element14, ComponentLink3URL=https://datasheet.ciiva.com/46440/1868787-46440904.pdf?src-supplier=Element14, ComponentLink4Description=https://datasheet.ciiva.com/2454/pyu-r-int-thick-7-2454865.pdf?src-supplier=Digi-Key, ComponentLink4URL=https://datasheet.ciiva.com/2454/pyu-r-int-thick-7-2454865.pdf?src-supplier=Digi-Key, ComponentLink5Description=https://datasheet.ciiva.com/2454/pyu-r-int-thick-7-2454866.pdf?src-supplier=Digi-Key, ComponentLink5URL=https://datasheet.ciiva.com/2454/pyu-r-int-thick-7-2454866.pdf?src-supplier=Digi-Key, ComponentLink6Description=https://datasheet.ciiva.com/2454/pyu-r-int-thick-7-2454864.pdf?src-supplier=Digi-Key, ComponentLink6URL=https://datasheet.ciiva.com/2454/pyu-r-int-thick-7-2454864.pdf?src-supplier=Digi-Key, ComponentLink7Description=https://datasheet.ciiva.com/12555/rc0603-272842-12555334.pdf?src-supplier=Mouser, ComponentLink7URL=https://datasheet.ciiva.com/12555/rc0603-272842-12555334.pdf?src-supplier=Mouser, ComponentLink8Description=https://datasheet.ciiva.com/7746/443971-7746329.pdf?src-supplier=Element14, ComponentLink8URL=https://datasheet.ciiva.com/7746/443971-7746329.pdf?src-supplier=Element14, ComponentLink9Description=https://datasheet.ciiva.com/7746/443971-7746330.pdf?src-supplier=Element14, ComponentLink9URL=https://datasheet.ciiva.com/7746/443971-7746330.pdf?src-supplier=Element14, Depth=0.8mm, Designed by=ADAK, Features="Moisture Resistant", Height=0.45mm, Lead Free="Lead Free", Length=1.6mm, Manufacturer Part Number=RC0603FR-07330RL, Number of Pins=2, Number of Terminations=2, Packaging="Tape and Reel", Power Rating=100mW, Pricing 1="1=0,1, 10=0,018, 50=0,0106, 100=0,0088, 500=0,00592, 1000=0,00505 (USD)", Reach SVHC Compliant=No, RoHS=Yes, RoHS Compliant=Yes, Series=RC, Size Code=0603, Stock 1=1275960, Supplier 1=Digi-Key, Technology="THICK FILM", Termination=SMD/SMT, Tolerance=1%, Voltage Rating (DC)=50V, Width=0.8mm
SW1 SW2: "SWITCH TACTILE SPST-NO 50MA 12V", Manufacturer=E-Switch, Max Operating Temperature=70°C, Min Operating Temperature=-20°C, Operating Force=260gf, Supplier Part Number 1=EG5353CT-ND, Actuator Type=Standard, Category="Tactile Switches", ComponentLink1Description=http://www.farnell.com/datasheets/2554191.pdf?src-supplier=Farnell, ComponentLink1URL=http://www.farnell.com/datasheets/2554191.pdf?src-supplier=Farnell, ComponentLink2Description=http://www.farnell.com/datasheets/2554191.pdf?src-supplier=Newark, ComponentLink2URL=http://www.farnell.com/datasheets/2554191.pdf?src-supplier=Newark, ComponentLink3Description=http://spec_sheets.e-switch.com/specs/P010471.pdf?src-supplier=Mouser, ComponentLink3URL=http://spec_sheets.e-switch.com/specs/P010471.pdf?src-supplier=Mouser, ComponentLink4Description=http://www.farnell.com/datasheets/2554191.pdf?src-supplier=Element14, ComponentLink4URL=http://www.farnell.com/datasheets/2554191.pdf?src-supplier=Element14, ComponentLink5Description=http://spec_sheets.e-switch.com/specs/P010471.pdf?src-supplier=Digi-Key, ComponentLink5URL=http://spec_sheets.e-switch.com/specs/P010471.pdf?src-supplier=Digi-Key, ComponentLink6Description=http://spec_sheets.e-switch.com/specs/P010471.pdf?src-supplier=NAC+Semi, ComponentLink6URL=http://spec_sheets.e-switch.com/specs/P010471.pdf?src-supplier=NAC+Semi, Designed by=ADAK, Lead Free="Lead Free", Manufacturer Part Number=TL3305AF260QG, Mechanical Life=200000Cycles, Mount="Surface Mount", Packaging="Cut Tape", Pricing 1="1=0,21, 10=0,205, 25=0,1944, 100=0,176, 250=0,16048, 500=0,14918, 1000=0,12726 (USD)", RoHS=No, Series=TL3305, Stock 1=83741, Supplier 1=Digi-Key, Switch Function=Off-Mom, Switch Travel=0.2mm, Termination="Gull Wing", Throw Configuration=SPST, Illumination Type=Non-Illuminated
U1: "Low Dropout Voltage Regulatator SOT-223 1A 3.3V", Current=1A, Package=SOT-223, Voltage-Ouptut(Fixed)=3.3V, Designed by=ADAK
U2: "IC TRANSCEIVER FULL 1/1 14SOIC", Manufacturer="Texas Instruments", Supplier Part Number 1=296-40505-1-ND, Category="Interface ICs", ComponentLink1Description=http://www.ti.com/general/docs/suppproductinfo.tsp?distId=10&amp;gotoUrl=http%3A%2F%2Fwww.ti.com%2Flit%2Fgpn%2Fsn65hvd1473&src-supplier=Digi-Key, ComponentLink1URL=http://www.ti.com/general/docs/suppproductinfo.tsp?distId=10&amp;gotoUrl=http%3A%2F%2Fwww.ti.com%2Flit%2Fgpn%2Fsn65hvd1473&src-supplier=Digi-Key, ComponentLink2Description=http://www.ti.com/lit/ds/symlink/sn65hvd1473.pdf?src-supplier=Digi-Key, ComponentLink2URL=http://www.ti.com/lit/ds/symlink/sn65hvd1473.pdf?src-supplier=Digi-Key, ComponentLink3Description=http://www.ti.com/general/docs/lit/getliterature.tsp?genericPartNumber=SN65HVD1477&&fileType=pdf&src-supplier=Avnet, ComponentLink3URL=http://www.ti.com/general/docs/lit/getliterature.tsp?genericPartNumber=SN65HVD1477&&fileType=pdf&src-supplier=Avnet, Designed by=ADAK, Manufacturer Part Number=SN65HVD1473DR, Pricing 1="1=4,39, 10=3,94, 25=3,7248, 100=3,228, 250=3,06248, 500=2,74794, 1000=2,31755 (USD)", RoHS=Yes, Stock 1=2430, Supplier 1=Digi-Key
U3: "IC MCU 32BIT 256KB FLASH 64LQFP", Case/Package=LQFP, Frequency=72MHz, Manufacturer=STMicroelectronics, Max Operating Temperature=85°C, Max Power Dissipation=444mW, Max Supply Voltage=3.6V, Min Operating Temperature=-40°C, Min Supply Voltage=2V, Package Quantity=160, Supplier Part Number 1=497-8914-ND, Category=Microcontrollers, ComponentLink1Description=https://datasheet.ciiva.com/8054/1455641-8054992.pdf?src-supplier=Element14, ComponentLink1URL=https://datasheet.ciiva.com/8054/1455641-8054992.pdf?src-supplier=Element14, Core Architecture=ARM, Data Bus Width=32b, Density=256KB, Designed by=ADAK, Height=1.45mm, Lead Free="Lead Free", Length=10mm, Manufacturer Part Number=STM32F107RCT6, Max Frequency=72MHz, Memory Size=256KB, Memory Type=FLASH, Number of ADC Channels=16, Number of Ethernet Channels=1, Number of Pins=64, Number of Programmable I/O=51, Number of PWM Channels=16, Number of SPI Channels=3, Number of Timers/Counters=7, Number of I2C Channels=1, Number of I/Os=51, Oscillator Type=Internal, Packaging=Tray, Peripherals="POR,PWM,WDT,DMA,Voltage Detect,I2C", Pricing 1="1=10,39, 10=9,39, 25=8,9536, 160=7,77419, 320=7,42478, 480=6,76965, 960=6,18045 (USD)", Radiation Hardening=No, RAM Size=64KB, Reach SVHC Compliant=No, RoHS=Yes, RoHS Compliant=Yes, Series="STM32 F1", Stock 1=1012, Supplier 1=Digi-Key, Termination=SMD/SMT, Watchdog Timer=Yes, Width=10mm, Interface=I2C,SPI,USB,CAN,Ethernet,IrDA,UART,USART,LIN,I2S
Y1: "CRYSTAL 8.0000MHZ 20PF SMD", Frequency="8 MHz", Manufacturer="ECS International", Supplier Part Number 1=XC1526CT-ND, Category=Crystals, ComponentLink1Description=https://datasheet.ciiva.com/852/csm-7x-du-852880.pdf?src-supplier=Digi-Key, ComponentLink1URL=https://datasheet.ciiva.com/852/csm-7x-du-852880.pdf?src-supplier=Digi-Key, ComponentLink2Description=https://datasheet.ciiva.com/852/csm-7x-du-852879.pdf?src-supplier=Digi-Key, ComponentLink2URL=https://datasheet.ciiva.com/852/csm-7x-du-852879.pdf?src-supplier=Digi-Key, ComponentLink3Description=https://datasheet.ciiva.com/852/csm-7x-du-852881.pdf?src-supplier=Digi-Key, ComponentLink3URL=https://datasheet.ciiva.com/852/csm-7x-du-852881.pdf?src-supplier=Digi-Key, ComponentLink4Description=https://datasheet.ciiva.com/4946/csm-7x-du-4946102.pdf?src-supplier=Mouser, ComponentLink4URL=https://datasheet.ciiva.com/4946/csm-7x-du-4946102.pdf?src-supplier=Mouser, Designed by=ADAK, Manufacturer Part Number=ECS-80-20-5PXDU-TR, Pricing 1="1=0,48, 10=0,402, 50=0,362, 100=0,3218, 500=0,30572 (USD)", RoHS=Yes, Stock 1=109954, Supplier 1=Digi-Key

## Via types
v1: diameter 0.6, hole 0.3, Top Layer to Bottom Layer, tented both sides, 370 vias

## Nets (pads, with @x,y where several pads share a name; then routed paths per layer and width w, separated by ;. In a path a pad name is that pad's centre, name@x,y a point inside that pad or via, vN(x,y) a via of type N, cw(c..) or ccw(c..) an arc to the next point about the centre after c; other vN are vias at no path point)
3V3: C3.2 C4.2 C5.2 C10.2 C11.2 C12.2 C13.2 C14.2 C15.2 C16.2 D2.2 J3.1 J4.1 J9.1 J10.1 R3.2 R4.2 R8.1 R9.1 U1.2 U2.13 U2.14 U3.1 U3.13 U3.19 U3.32 U3.48 U3.64 | length 246.1
  Top Layer w0.3: C14.2 33.8,19.35 U3.64 ; C15.2 35.6,15.7 36.25,16.35 U3.1 ; C13.2 36.25,31.75 U3.48 ; C16.2 42.25,16.9 U3.13 ; U3.19 47.45,20.35 v1(47.5,20.3) ; U3.32 49.65,26.85 C12.2
  Top Layer w0.5: D2.2 9.2,35.9 ; v1(17.7,21.3) 19.5,23.1 25,23.1 ; R3.2 R4.2 25,23.1 ; U2.13 26.24,10.06 26.6,9.7 C5.2 ; U2.14 27.505,12.02 27.505,9.705 C5.2 ; C14.2 30.35,19.35 30,19 30,17 ; C15.2 34.2,16.6 33.8,17 30,17 ; C13.2 36.2,33 35.6,33.6 31.35,33.6 J10.1 26.85,39.55 26.3,40.1 12.5,40.1 9.2,36.8 9.2,35.9 ; v1(36.7,7.1) R8.1 39.8,7.1 40.2,6.7 v1(40.2,6.3) ; C16.2 42.25,14.493 42.543,14.2 46.8,14.2 47.5,14.9 v1(47.5,20.3) ; v1(48.4,22.2) 49.1,22.2 49.7,21.6 C10.2 49.725,20.375 51.775,20.375 C11.2 53.9,20.4 ; C12.2 v1(53.9,26.8) ; v1(53,7.1) R9.1 55.7,7.1 56.1,6.7 v1(56.1,6.2) ; v1(53.9,21.6) 53.9,20.4 ; v1(63,6.2) 63,7.207 63.293,7.5 J9.1 67.1,7.5 67.5,7.9 J4.1 56.34,17.96 53.9,20.4 ; 9.2,35.9 10.5,34.6 10.5,30.3 C4.2 C3.2 U1.2 19.5,28.6 25,23.1 ; C5.2 v1(27.5,7.8) 29,7.8 30,8.8 30,17
  Bottom Layer w0.5: v1(17.7,21.3) 17.7,8.3 16.5,7.1 16.5,3.14 J3.1 17.5,3.1 17.925,3.525 17.925,3.545 22.18,7.8 v1(27.5,7.8) 36,7.8 v1(36.7,7.1) ; v1(40.2,6.3) 52.2,6.3 v1(53,7.1) ; v1(47.5,20.3) 47.5,21.3 v1(48.4,22.2) ; v1(53.9,21.6) v1(53.9,26.8) ; v1(56.1,6.2) v1(63,6.2)
5V: C1.2 C2.2 D1.2 H1.1 J2.1 J7.1 U1.3 | length 108.5
  Top Layer w0.5: J2.1 7.4,14.5 9.5,16.6 9.5,24.1 8.9,24.7 ; H1.1 8.9,24.7 ; D1.2 9,31.4 ; v1(9,34.2) 9,31.4 ; U1.3 C2.2 C1.2 ; v1(62.8,26.5) J7.1 ; 8.9,24.7 10.51,26.31 C1.2 ; 9,31.4 9.7,30.7 9.7,29.5 11.9,27.3 11.907,27.3 12.2,27.007 C1.2
  Bottom Layer w0.5: v1(9,34.2) 11.5,36.7 11.5,38.4 12.375,39.275 61.525,39.275 64.2,36.6 64.2,26.9 63.8,26.5 v1(62.8,26.5)
BAR30_SCL: J2.2 U3.58 | length 40
  Top Layer w0.254: J2.2 15.5,13.5 16.5,14.5 16.5,23.2 v1(17.427,24.127) ; v1(33,23.6) 33,22.701 33.351,22.35 U3.58
  Bottom Layer w0.254: v1(17.427,24.127) 17.454,24.1 32.5,24.1 v1(33,23.6)
BAR30_SDA: J2.3 U3.59 | length 39.2
  Top Layer w0.254: J2.3 15.4,12.5 17,14.1 17,22.7 v1(17.4,23.1) ; v1(32.1,23.1) 33.35,21.85 U3.59
  Bottom Layer w0.254: v1(17.4,23.1) v1(32.1,23.1)
BOOT0: J3.2 U3.60 | length 34.3
  Top Layer w0.254: J3.2 19,21.3 v1(20,22.3) ; v1(32.1,22.3) 33.05,21.35 U3.60
  Bottom Layer w0.254: v1(20,22.3) v1(32.1,22.3)
BOOT1: J4.2 U3.28 | length 23.6
  Top Layer w0.254: U3.28 54.55,24.85 58.9,20.5 J4.2
ESC1: J1.1 U3.37 | length 25.4
  Top Layer w0.254: U3.37 41.75,29.85 43.5,31.6 51,31.6 52.5,33.1 61,33.1 62.75,34.85 J1.1
ESC2: J1.2 U3.38 | length 25.2
  Top Layer w0.254: U3.38 41.25,30.35 43,32.1 50.7,32.1 52.2,33.6 60.5,33.6 61.75,34.85 J1.2
ESC3: J1.3 U3.39 | length 24.9
  Top Layer w0.254: U3.39 40.75,30.701 42.649,32.6 50.3,32.6 51.8,34.1 60,34.1 60.75,34.85 J1.3
ESC4: J1.4 U3.40 | length 24.7
  Top Layer w0.254: U3.40 40.25,31.201 42.149,33.1 50,33.1 51.5,34.6 59.5,34.6 59.75,34.85 J1.4
GND: C1.1 C2.1 C3.1 C4.1 C5.1 C6.1 C7.1 C8.2 C9.2 C10.1 C11.1 C12.1 C13.1 C14.1 C15.1 C16.1 D3.1 H1.5 H1.S1 H1.S2 H1.S3 H1.S4 J1.8 J2.8 J3.3 J4.3 J5.8 J6.8 J7.8 J8.8 J9.8 J10.3 R1.1 R2.1 R6.2 SW1.1 SW1.2 SW2.1 SW2.2 U1.1 U2.6 U2.7 U3.12 U3.18 U3.31 U3.47 U3.63
  other v1: 6.6,1.7 8.6,1.7 10.6,1.7 12.6,1.7 14.6,1.7 16.6,1.7 18.6,1.7 20.6,1.7 22.6,1.7 26.6,1.7 28.6,1.7 30.6,1.7 32.6,1.7 36.6,1.7 40.6,1.7 42.6,1.7 44.6,1.7 50.6,1.7 52.6,1.7 56.6,1.7 58.6,1.7 60.6,1.7 64.6,1.7 5.6,3.7 7.6,3.7 9.6,3.7 11.6,3.7 13.6,3.7 23.6,3.7 25.6,3.7 27.6,3.7 29.6,3.7 31.6,3.7 33.6,3.7 35.6,3.7 37.6,3.7 41.6,3.7 43.6,3.7 47.6,3.7 53.6,3.7 57.6,3.7 59.6,3.7 63.6,3.7 2.6,5.7 4.6,5.7 6.6,5.7 8.6,5.7 10.6,5.7 12.6,5.7 14.6,5.7 24.6,5.7 34.6,5.7 36.6,5.7 52.6,5.7 64.6,5.7 66.6,5.7 1.6,7.7 3.6,7.7 7.6,7.7 9.6,7.7 11.6,7.7 13.6,7.7 15.6,7.7 19.6,7.7 43.6,7.7 45.6,7.7 47.6,7.7 49.6,7.7 51.6,7.7 59.6,7.7 61.6,7.7 69.6,7.7 0.6,9.7 2.6,9.7 6.6,9.7 8.6,9.7 10.6,9.7 12.6,9.7 14.6,9.7 16.6,9.7 32.6,9.7 34.6,9.7 36.6,9.7 40.6,9.7 46.6,9.7 48.6,9.7 50.6,9.7 52.6,9.7 56.6,9.7 58.6,9.7 62.6,9.7 68.6,9.7 1.6,11.7 3.6,11.7 7.6,11.7 9.6,11.7 11.6,11.7 13.6,11.7 15.6,11.7 39.6,11.7 51.6,11.7 55.6,11.7 57.6,11.7 61.6,11.7 63.6,11.7 69.6,11.7 0.6,13.7 2.6,13.7 20.6,13.7 22.6,13.7 24.6,13.7 26.6,13.7 28.6,13.7 32.6,13.7 34.6,13.7 36.6,13.7 50.6,13.7 52.6,13.7 54.6,13.7 58.6,13.7 60.6,13.7 62.6,13.7 68.6,13.7 3.6,15.7 5.6,15.7 7.6,15.7 9.6,15.7 11.6,15.7 13.6,15.7 15.6,15.7 25.6,15.7 31.6,15.7 51.6,15.7 53.6,15.7 57.6,15.7 59.6,15.7 61.6,15.7 63.6,15.7 65.6,15.7 4.6,17.7 10.6,17.7 12.6,17.7 14.6,17.7 28.6,17.7 32.6,17.7 34.6,17.7 44.6,17.7 46.6,17.7 54.6,17.7 3.6,19.7 11.6,19.7 13.6,19.7 15.6,19.7 19.6,19.7 29.6,19.7 35.6,19.7 37.6,19.7 39.6,19.7 41.6,19.7 43.6,19.7 53.6,19.7 55.6,19.7 57.6,19.7 59.6,19.7 61.6,19.7 63.6,19.7 65.6,19.7 69.6,19.7 0.6,21.7 2.6,21.7 10.6,21.7 12.6,21.7 14.6,21.7 22.6,21.7 36.6,21.7 38.6,21.7 40.6,21.7 42.6,21.7 44.6,21.7 50.6,21.7 52.6,21.7 56.6,21.7 58.6,21.7 60.6,21.7 62.6,21.7 64.6,21.7 66.6,21.7 68.6,21.7 1.6,23.7 3.6,23.7 11.6,23.7 13.6,23.7 15.6,23.7 35.6,23.7 37.6,23.7 39.6,23.7 41.6,23.7 43.6,23.7 47.6,23.7 49.6,23.7 51.6,23.7 57.6,23.7 59.6,23.7 61.6,23.7 63.6,23.7 65.6,23.7 69.6,23.7 0.6,25.7 2.6,25.7 6.6,25.7 8.6,25.7 36.6,25.7 38.6,25.7 40.6,25.7 42.6,25.7 44.6,25.7 56.6,25.7 58.6,25.7 60.6,25.7 62.6,25.7 64.6,25.7 66.6,25.7 3.6,27.7 9.6,27.7 13.6,27.7 15.6,27.7 17.6,27.7 21.6,27.7 27.6,27.7 29.6,27.7 31.6,27.7 33.6,27.7 35.6,27.7 37.6,27.7 39.6,27.7 41.6,27.7 43.6,27.7 45.6,27.7 47.6,27.7 51.6,27.7 53.6,27.7 67.6,27.7 69.6,27.7 0.6,29.7 2.6,29.7 4.6,29.7 8.6,29.7 16.6,29.7 18.6,29.7 20.6,29.7 22.6,29.7 26.6,29.7 28.6,29.7 30.6,29.7 34.6,29.7 44.6,29.7 46.6,29.7 48.6,29.7 50.6,29.7 52.6,29.7 54.6,29.7 56.6,29.7 58.6,29.7 60.6,29.7 62.6,29.7 68.6,29.7 1.6,31.7 3.6,31.7 11.6,31.7 13.6,31.7 15.6,31.7 19.6,31.7 21.6,31.7 23.6,31.7 27.6,31.7 29.6,31.7 31.6,31.7 33.6,31.7 53.6,31.7 55.6,31.7 57.6,31.7 59.6,31.7 61.6,31.7 67.6,31.7 69.6,31.7 0.6,33.7 2.6,33.7 4.6,33.7 12.6,33.7 14.6,33.7 16.6,33.7 18.6,33.7 20.6,33.7 22.6,33.7 24.6,33.7 26.6,33.7 62.6,33.7 68.6,33.7 1.6,35.7 3.6,35.7 11.6,35.7 13.6,35.7 15.6,35.7 19.6,35.7 39.6,35.7 41.6,35.7 51.6,35.7 53.6,35.7 65.6,35.7 67.6,35.7 6.6,37.7 8.6,37.7 12.6,37.7 28.6,37.7 30.6,37.7 32.6,37.7 34.6,37.7 36.6,37.7 38.6,37.7 40.6,37.7 42.6,37.7 44.6,37.7 46.6,37.7 48.6,37.7 50.6,37.7 52.6,37.7 54.6,37.7 56.6,37.7 58.6,37.7 60.6,37.7 64.6,37.7 5.6,39.7 7.6,39.7 9.6,39.7
JETSON_RX: J5.2 U3.43 | length 16.4
  Top Layer w0.254: U3.43 38.75,31.701 41.149,34.1 49,34.1 49.5,34.6 J5.2
JETSON_TX: J5.1 U3.42 | length 16.7
  Top Layer w0.254: U3.42 39.25,31.35 41.5,33.6 49.5,33.6 50.5,34.6 J5.1
NetD1_1: D1.1 R1.2 | length 1.7
  Top Layer w0.254: R1.2 D1.1
NetD2_1: D2.1 R2.2 | length 1.7
  Top Layer w0.254: R2.2 D2.1
NetD3_2: D3.2 R10.1 | length 2.5
  Top Layer w0.254: R10.1 D3.2
NRST: C8.1 J10.5 R8.2 SW1.3 SW1.4 U3.7 | length 76.2
  Top Layer w0.254: J10.5 16.69,35.91 17.8,34.8 24.3,34.8 25.5,33.6 v1(25.5,25.1) ; v1(28.5,19.6) 28.536,19.636 28.536,20.281 32.955,24.7 v1(33,24.7) ; v1(38.3,15.2) 38.357,15.2 38.9,14.657 R8.2 C8.1 40.9,7.6 41.4,7.1 45.2,7.1 46.1,6.2 SW1.4 SW1.3 ; U3.7 39.25,16.279 39.929,15.6 v1(40.5,15.6)
  Bottom Layer w0.254: v1(25.5,25.1) 25.9,24.7 v1(33,24.7) ; v1(28.5,19.6) 32.9,15.2 v1(38.3,15.2) 40.1,15.2 v1(40.5,15.6)
OSC_IN: C6.2 U3.5 Y1.1 | length 10.5
  Top Layer w0.254: C6.2 Y1.1 35.25,13.35 38.227,16.327 38.227,17.327 U3.5
OSC_OUT: C7.2 U3.6 Y1.2 | length 13.8
  Top Layer w0.254: U3.6 38.75,16.05 41.1,13.7 44.6,13.7 44.75,13.55 Y1.2 C7.2
POT: J9.2 U3.20 | length 26.5
  Top Layer w0.254: 53.6,17.3 62.4,8.5 J9.2
  Top Layer w0.3: U3.20 47.85,20.85 48.3,20.4 48.3,17.8 48.8,17.3 53.6,17.3
R_RS485_N: J8.3 R5.2 U2.11 | length 10.7
  Top Layer w0.254: U2.11 23.65,11.975 23.65,8.25 25.1,6.8 27.9,6.8 28.5,6.2 J8.3
R_RS485_P: J8.4 R5.1 U2.12 | length 10.4
  Top Layer w0.254: U2.12 24.97,10.43 25.15,10.25 R5.1 25.15,8.249 26.199,7.2 28.9,7.2 29.5,6.6 J8.4
RS485_RX: R3.1 U2.2 U3.52 | length 13.3
  Top Layer w0.254: U2.2 26.2,17.015 R3.1 27.487,20 32.837,25.35 U3.52
RS485_RX_EN: R4.1 U2.3 U3.62 | length 13
  Top Layer w0.254: U2.3 24.97,19.97 R4.1 25,20.5 25.2,20.7 v1(27.3,20.7) ; v1(32.1,20.7) 32.45,20.35 U3.62
  Bottom Layer w0.254: v1(27.3,20.7) v1(32.1,20.7)
RS485_TX: U2.5 U3.51 | length 31.5
  Top Layer w0.254: v1(21,21.6) 21,20.432 22.43,19.002 U2.5 ; v1(32,25.8) 32.05,25.85 U3.51
  Bottom Layer w0.254: v1(21,21.6) 19,21.6 18.6,22 16.7,22 16.2,22.5 16.2,25.3 16.7,25.8 v1(32,25.8)
RS485_TX_EN: R6.1 U2.4 U3.61 | length 16.9
  Top Layer w0.254: v1(22.5,20) R6.1 U2.4 ; v1(32.1,21.5) 32.75,20.85 U3.61
  Bottom Layer w0.254: v1(22.5,20) 24,21.5 v1(32.1,21.5)
SERVO: J6.1 U3.44 | length 7.3
  Top Layer w0.254: U3.44 J6.1
SONAR_RX: J7.3 U3.30 | length 20.9
  Top Layer w0.254: U3.30 54.319,25.85 56.969,28.5 J7.3
SONAR_TX: J7.2 U3.29 | length 20.7
  Top Layer w0.254: U3.29 54.557,25.35 56.707,27.5 J7.2
SWCLK: J10.2 U3.49 | length 16
  Top Layer w0.254: J10.2 32.5,29.91 32.5,27.6 33.25,26.85 U3.49
SWDIO: J10.4 U3.46 | length 24.4
  Top Layer w0.254: J10.4 21.33,36 v1(25,36) ; v1(37.2,33.3) 37.25,33.25 U3.46
  Bottom Layer w0.254: v1(25,36) 27.6,36 28.8,34.8 35.7,34.8 v1(37.2,33.3)
T_RS485_N: J8.2 R7.2 U2.10 | length 11.1
  Top Layer w0.254: U2.10 22.35,11.945 22.35,8.05 24,6.4 27.351,6.4 27.5,6.251 J8.2
T_RS485_P: J8.1 R7.1 U2.9 | length 11.2
  Top Layer w0.254: U2.9 21.16,10.56 20.85,10.25 R7.1 20.85,7.75 23.562,5.038 J8.1
USER_BUTTON: C9.1 R9.2 SW2.3 SW2.4 U3.14 | length 35.4
  Top Layer w0.254: U3.14 42.75,16.549 42.899,16.4 44.6,16.4 45.4,15.6 v1(46.5,15.6) ; v1(49,16.1) 54.9,10.2 R9.2 C9.1 56.9,7.6 57.4,7.1 61.6,7.1 62.1,6.6 SW2.4 SW2.3
  Bottom Layer w0.254: v1(46.5,15.6) 47,16.1 v1(49,16.1)
USER_LED: R10.2 U3.11 | length 18.2
  Top Layer w0.3: v1(41.2,15.2) 41.25,15.25 U3.11 ; v1(46,8.5) 49,5.5 R10.2
  Bottom Layer w0.3: v1(41.2,15.2) 41.2,10.9 41.9,10.2 44.3,10.2 v1(46,8.5)
pads on no net: H1. H1.2 H1.3 H1.4 J1.5 J1.6 J1.7 J1.P1 J1.P2 J2.4 J2.5 J2.6 J2.7 J2.P1 J2.P2 J5.3 J5.4 J5.5 J5.6 J5.7 J5.P1 J5.P2 J6.2 J6.3 J6.4 J6.5 J6.6 J6.7 J6.P1 J6.P2 J7.4 J7.5 J7.6 J7.7 J7.P1 J7.P2 J8.5 J8.6 J8.7 J8.P1 J8.P2 J9.3 J9.4 J9.5 J9.6 J9.7 J9.P1 J9.P2 J10.6 U1.4 U2.1 U2.8 U3.2 U3.3 U3.4 U3.8 U3.9 U3.10 U3.15 U3.16 U3.17 U3.21 U3.22 U3.23 U3.24 U3.25 U3.26 U3.27 U3.33 U3.34 U3.35 U3.36 U3.41 U3.45 U3.50 U3.53 U3.54 U3.55 U3.56 U3.57

## Polygon pours and split planes (outlines as drawn)
GND on Top Layer "GND_L01_P000" (solid, pour order 0): 0,0 70.6,0 70.6,41.2 0,41.2
GND on Bottom Layer "GND_L02_P001" (solid, pour order 1): 0,41.2 0,0 70.6,0 70.6,41.2

## Silkscreen, mask and mechanical layers (free items; w line width, h text height)
Top Overlay:
  drawing of 48 lines, arcs and shapes, not listed
  text "3.3V" at 5.8,36.9 h1.25
  text "SWD HEADER" at 16.8,35 h1.25
  text "ESC4" at 59.9,33.4 h0.75 r90
  text "ESC3" at 61,33.4 h0.75 r90